# Altium PCB CCS_v3.3.PcbDoc
Units mil, origin at the board's own origin, x right, y up, seen from the top; angles counter-clockwise.
Board outline 2225 x 3035 mil, 2 copper layers (Top Layer, Bottom Layer); 37 components, 44 nets, 265 pads, 36 vias.
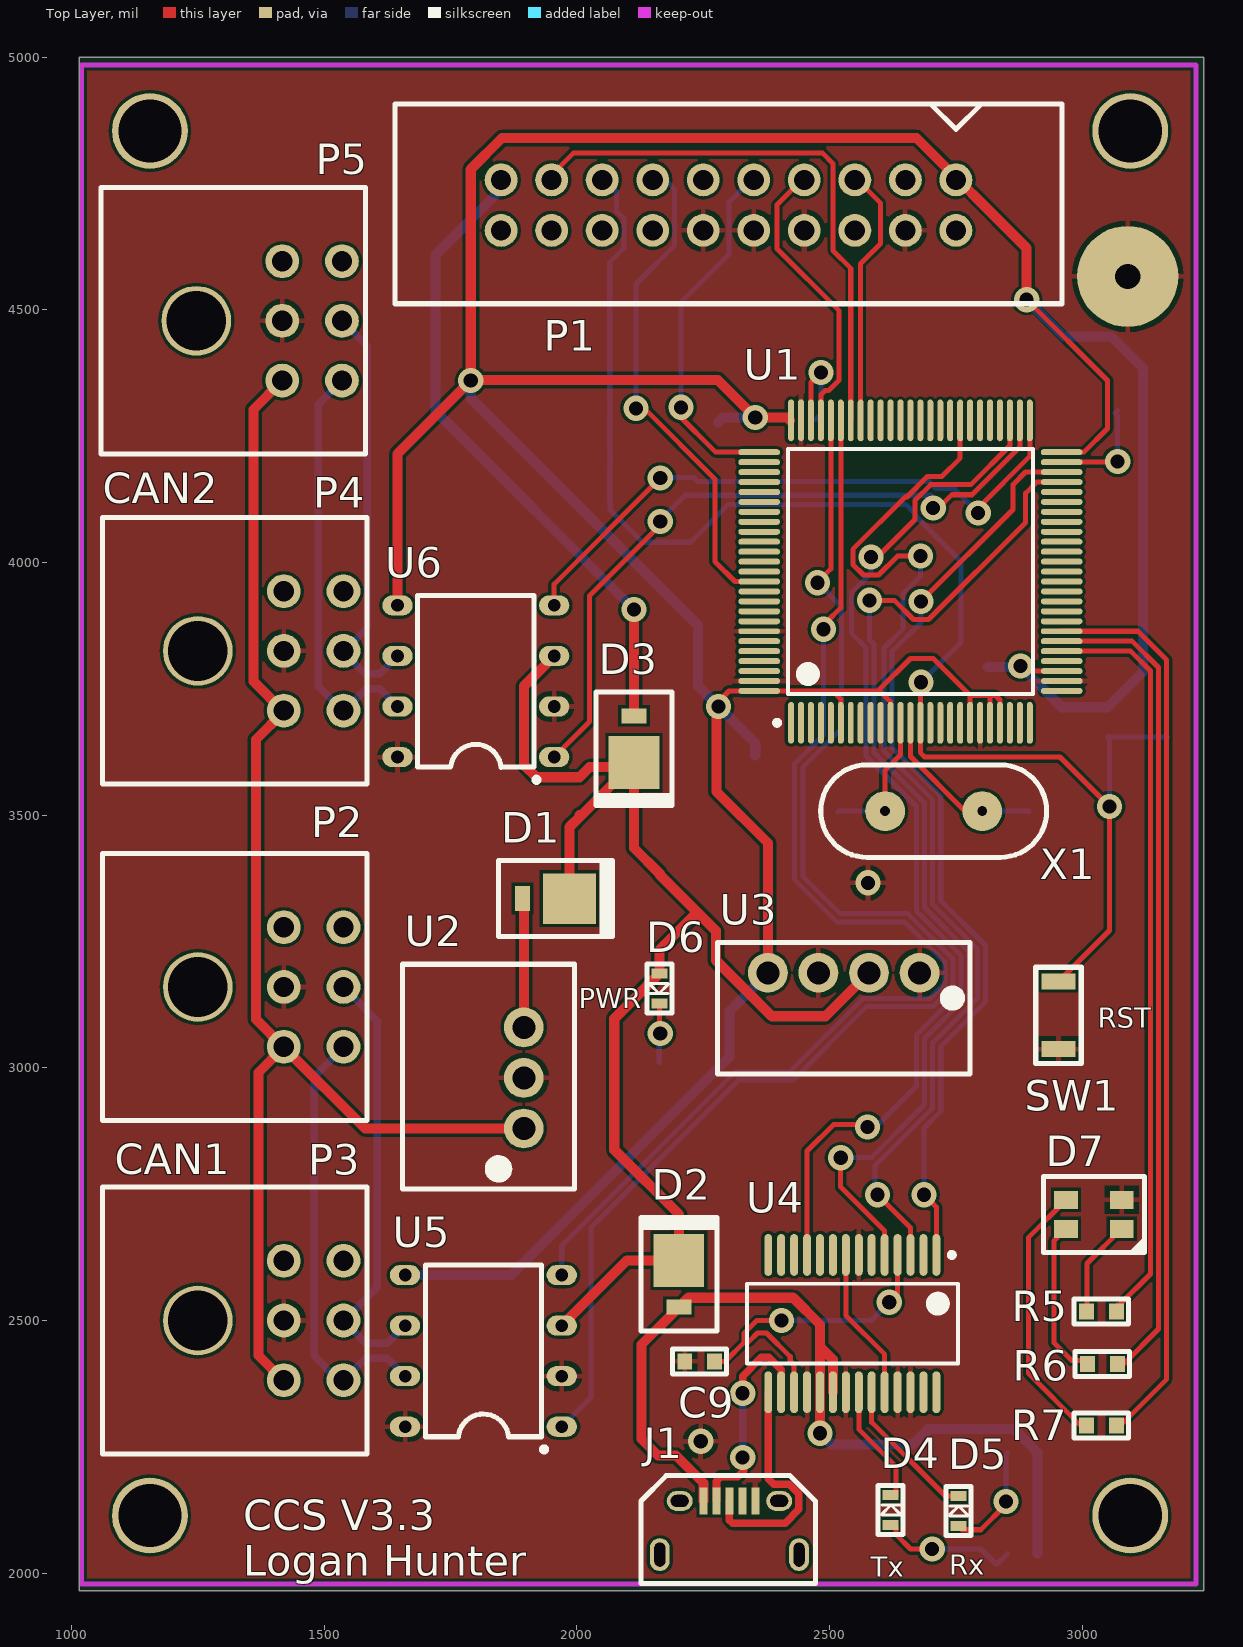
[diagram p0: Top Layer view]
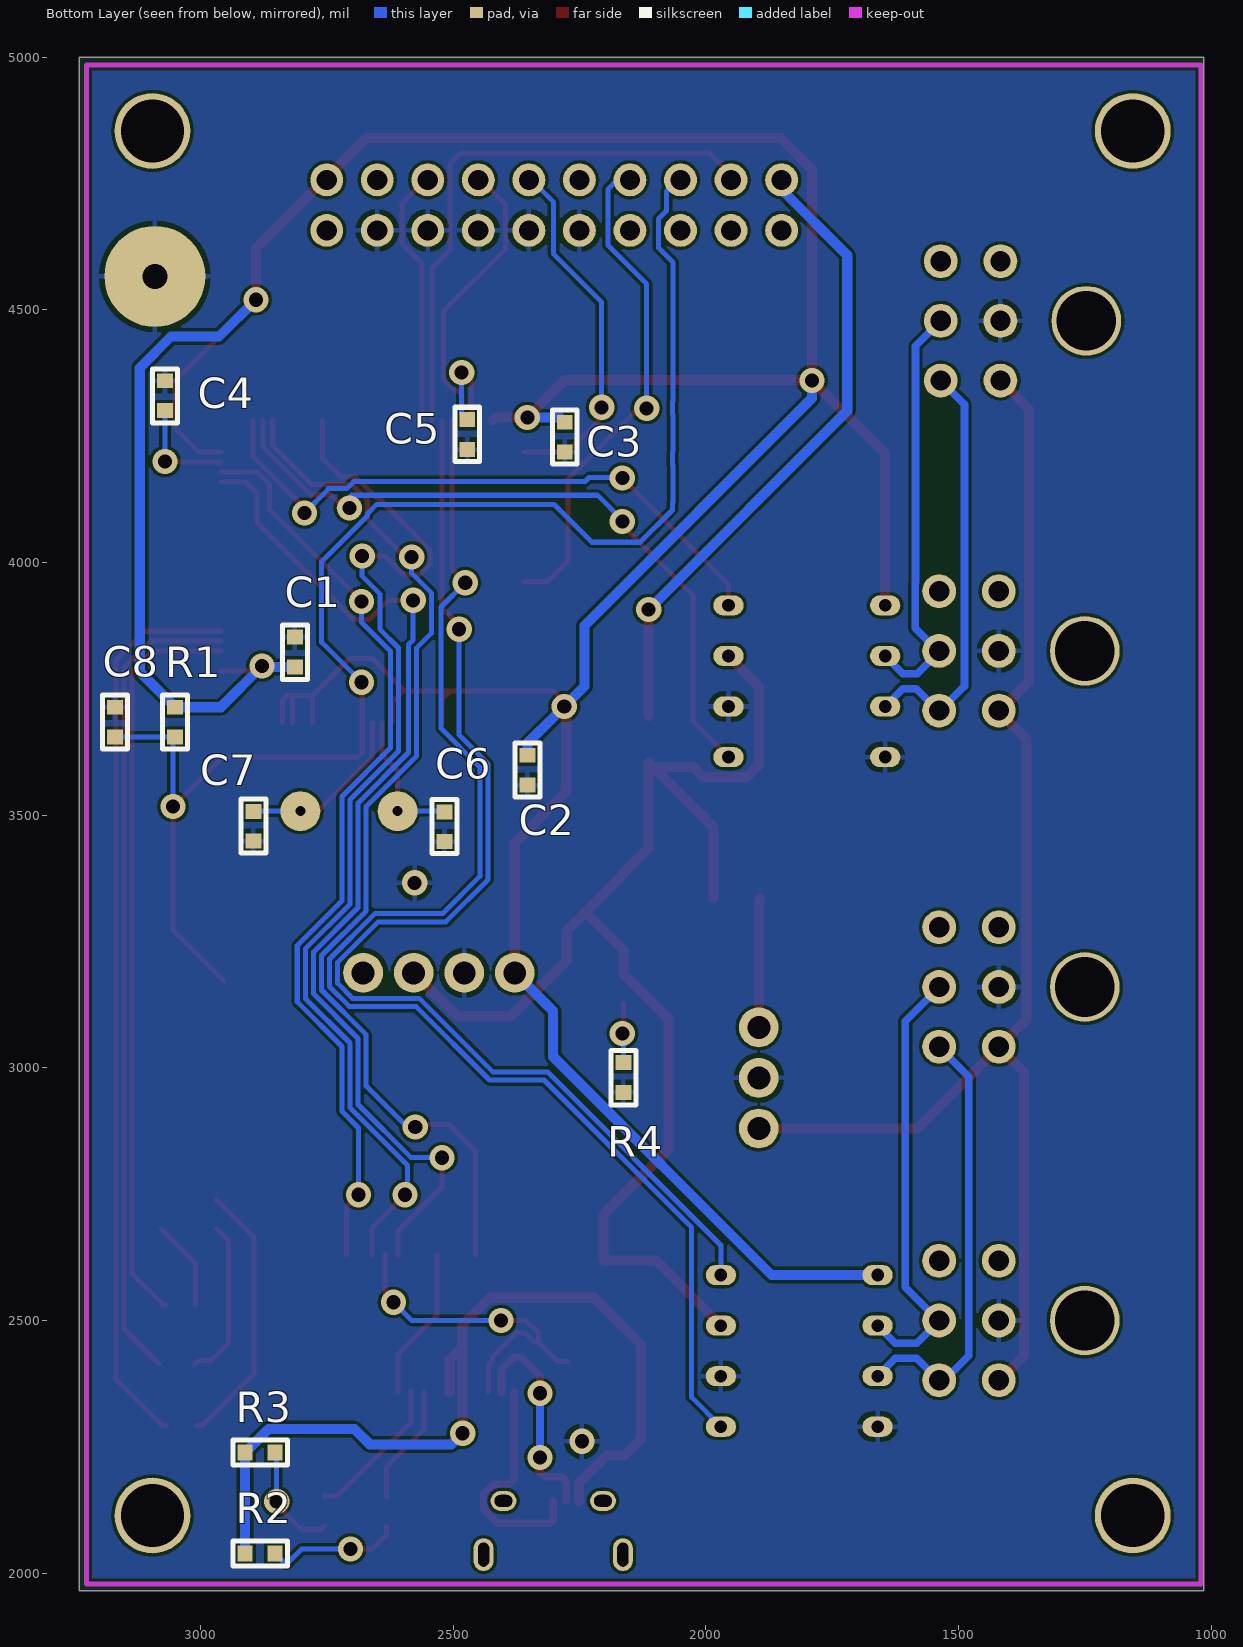
[diagram p1: Bottom Layer view, seen from below]

## Layer stack, top to bottom
Top Solder: solder mask 0.4, Solder Resist, Dk 3.5
Top Layer: signal copper 1.4
Dielectric 1: dielectric 12.6, FR-4, Dk 4.8
Bottom Layer: signal copper 1.4
Bottom Solder: solder mask 0.4, Solder Resist, Dk 3.5

## Board outline
1015,1965 3240,1965 3240,5000 1015,5000

## Design rules (kind name [scope] priority, off if disabled: settings)
Clearance [All] p1: gap=6
DiffPairsRouting [All] p1: maxlimit=10 minlimit=10 mostfreqgap=10 toplayer_minwidth=15 toplayer_maxwidth=15 toplayer_prefwidth=15 bottomlayer_minwidth=15 bottomlayer_maxwidth=15 bottomlayer_prefwidth=15 maxuncoupledlength=500
HoleSize [All] p1: absolutevalues=TRUE maxlimit=200 minlimit=6 maxpercent=80.000 minpercent=20.000
MinimumSolderMaskSliver [All] p1: minsoldermaskwidth=1
PolygonConnect [All] p1: connectstyle=Relief reliefconductorwidth=10 reliefentries=4 polygonreliefangle="90 Angle" airgapwidth=10
RoutingVias [All] p1: holewidth=28 width=50 viastyle="Through Hole" minholewidth=28 minwidth=50 maxholewidth=28 maxwidth=50
SilkToSilkClearance [All] p1: silktosilkclearance=3
SilkToSolderMaskClearance [IsPad] p1: minsilkscreentomaskgap=2 clearancetoexposedcopper=TRUE
SolderMaskExpansion [All] p1: expansion=4
Width [All] p1: maxlimit=30 minlimit=5 preferedwidth=10
25 further rules are at their usual default settings.

## Classes and differential pairs
component class Communications: C9 D4 D5 R2 R3 U4 U5 U6
component class Conectors: J1 P1 P2 P3 P4 P5
component class MCU: C4 C5 C6 C7 C8 D7 R1 R5 R6 R7 SW1 U1 X1
component class Power: C1 C2 C3 D1 D2 D3 D6 R4 U2 U3
differential pair CAN1: +CAN1_P -CAN1_N
differential pair CAN2: +CAN2_P -CAN2_N
differential pair USBD: +USBD_P -USBD_N

## Components (designator, comment, footprint, x,y, rotation, side; value= is the part's Value field where it differs from the comment)
C1 "SCH_GENERIC_CAPACITOR_0603" PCB_GENERIC_SMD_0603 2813,3823 r270 bottom
C2 "SCH_GENERIC_CAPACITOR_0603" PCB_GENERIC_SMD_0603 2353,3589 r90 bottom
C3 "SCH_GENERIC_CAPACITOR_0603" PCB_GENERIC_SMD_0603 2279,4248 r90 bottom
C4 "SCH_GENERIC_CAPACITOR_0603" PCB_GENERIC_SMD_0603 3070,4330 r270 bottom
C5 "SCH_GENERIC_CAPACITOR_0603" PCB_GENERIC_SMD_0603 2472,4253 r90 bottom
C6 "SCH_GENERIC_CAPACITOR_0603" PCB_GENERIC_SMD_0603 2517,3477 r90 bottom
C7 "SCH_GENERIC_CAPACITOR_0603" PCB_GENERIC_SMD_0603 2895,3478 r90 bottom
C8 "SCH_GENERIC_CAPACITOR_0603" PCB_GENERIC_SMD_0603 3169,3684 r90 bottom
C9 "SCH_GENERIC_CAPACITOR_0603" PCB_GENERIC_SMD_0603 2243,2419 r180 top
D1 "Schottky Diode" "ON Semi Schottky Diode - MBRM110LT1G" 1920,3335 r180 top
D2 "Schottky Diode" "ON Semi Schottky Diode - MBRM110LT1G" 2202,2554 r270 top
D3 "Schottky Diode" "ON Semi Schottky Diode - MBRM110LT1G" 2113,3669 r90 top
D4 "Green LED" SMD_0603_LED 2619,2125 r90 top
D5 "Orange LED" SMD_0603_LED 2753,2123 r90 top
D6 "Red LED" SMD_0603_LED 2165,3157 r270 top
D7 "TriColourLED" "TricolourLED - SunLED - DK  1497-1225-2-ND" 3023,2710 r0 top
J1 "Amphenol MicroUSB" "Amphenol MicroUSB" 2301.82,2143 r0 top
P1 "SWD/VCOM Header" "Samtec TST-110-01-G-D" 1850,4757 r0 top
P2 "CAN1" PCB_MLX_MICROFIT_3X2 1250,3160 r270 top
P3 "CAN1 TERM" PCB_MLX_MICROFIT_3X2 1250,2500 r270 top
P4 "CAN2" PCB_MLX_MICROFIT_3X2 1250,3825 r270 top
P5 "CAN2 TERM" PCB_MLX_MICROFIT_3X2 1246.9,4478.08 r270 top
R1 "SCH_GENERIC_RESISTOR_0603" PCB_GENERIC_SMD_0603 3050,3684 r90 bottom
R2 "SCH_GENERIC_RESISTOR_0603" PCB_GENERIC_SMD_0603 2881.98,2039 r180 bottom
R3 "SCH_GENERIC_RESISTOR_0603" PCB_GENERIC_SMD_0603 2881.98,2239 r180 bottom
R4 "SCH_GENERIC_RESISTOR_0603" PCB_GENERIC_SMD_0603 2163,2981 r270 bottom
R5 "SCH_GENERIC_RESISTOR_0603" PCB_GENERIC_SMD_0603 3038,2518 r180 top
R6 "SCH_GENERIC_RESISTOR_0603" PCB_GENERIC_SMD_0603 3040,2414 r180 top
R7 "SCH_GENERIC_RESISTOR_0603" PCB_GENERIC_SMD_0603 3038,2292 r180 top
SW1 "Reset Switch" "Push Button Switch" 2953,3104 r270 top
U1 "STM32F407VGT6" STM-LQFP100_M 2660,3982 r90 top
U2 "R78E-1.0 DC/DC" R78-1.0 1895,2980 r90 top
U3 "RECOM RO Series" "RECOM RO Series 1W DCDC" 2678,3188 r180 top
U4 "IC_FT232RL" SSOP-28 2545,2494 r270 top
U5 "MCP2562" MCP2562 1815,2440 r180 top
U6 "MCP2562" MCP2562 1800,3765 r180 top
X1 "XTAL" CRYSTAL_8MHZ 2706,3508 r0 top

## Footprints (in the part's own frame and the unit in brackets; to place one, negate y for a bottom-side part, rotate by r counter-clockwise, add the part's x,y. Pads: shape width x height; smd on the part's side, far side on the other; paste and mask are expansions set on the pad)
"Amphenol MicroUSB" [mm] "10118194-0001LF"
  rect 0.4x1.35 smd: 1(-1.3,0) 2(-0.65,0) 3(0,0) 4(0.65,0) 5(1.3,0)
  oval 1x1.65 hole 0.55 slot 1.2 at 90 deg: ""(-3.5,-2.7) ""(3.5,-2.7)
  oval 1.3x1 hole 0.6 slot 0.9 at 0 deg: ""(-2.5,0) ""(2.5,0)
  silkscreen extent -4.44,-4.15 4.32,1.27, body extent -4.06,-5.21 4.06,0.51, height 2.4
CRYSTAL_8MHZ [mm] "631-1100-ND"
  round 2 hole 0.5: 1(-2.44,0) 2(2.44,0)
  silkscreen extent -5.68,-2.32 5.68,2.32, body extent -5.59,-1.85 5.59,1.85, height 3.6
MCP2562 [mil]
  oval 60x40 hole 25: 1(-155,150) 2(-155,50) 3(-155,-50) 4(-155,-150) 5(155,-150) 6(155,-50) 7(155,50) 8(155,150)
  silkscreen extent -125,-170 115,200, body extent -115,-170 115,170, height 210
"ON Semi Schottky Diode - MBRM110LT1G" [mil]
  rect 105x100 smd: 1(-65,0)
  rect 30x50 smd: 2(27.5,0)
  silkscreen extent -150,-75 75,75, body extent -115,-65 0,65, height 40
PCB_GENERIC_SMD_0603 [mm]
  rect 0.75x0.8 smd: 1(-0.75,0) 2(0.75,0)
  silkscreen extent -1.35,-0.63 1.38,0.63, body extent -0.75,-0.5 0.75,0.5, height 0.45
PCB_MLX_MICROFIT_3X2 [mm]
  round 1.7 hole 1.02: 1(3,4.32) 2(0,4.32) 3(-3,4.32) 4(3,7.32) 5(0,7.32) 6(-3,7.32)
  round 3.5 hole 3: ""(0,0)
  silkscreen extent -6.7,-4.8 6.7,8.5, body extent -6.57,-4.65 6.58,7.59, height 8.83
"Push Button Switch" [mm]
  rect 0.8x1.7 smd: 1(-1.7,0) 2(1.7,0)
  silkscreen extent -2.41,-1.14 2.41,1.14, body extent -2.16,-0.89 2.16,0.89, height 1.6
R78-1.0 [mm]
  round 2 hole 1.15: 1(-2.54,0) 2(0,0) 3(2.54,0)
  silkscreen extent -5.59,-2.54 5.71,6.1, body extent -4.44,-1.59 4.45,5.4, height 10.4
"RECOM RO Series 1W DCDC" [mm] "RO-053.3S"
  round 2 hole 1.15: 1(0,0) 2(2.54,0) 3(5.08,0) 4(7.62,0)
  silkscreen extent -2.54,-1.52 10.16,5.08, body extent -2.41,-1.4 10.03,4.95, height 10
"Samtec TST-110-01-G-D" [mil] "TST-110-01-G-D"
  round 65 hole 40: 1(900,0) 2(900,-100) 3(800,0) 4(800,-100) 5(700,0) 6(700,-100) 7(600,0) 8(600,-100) 9(500,0) 10(500,-100) 11(400,0) 12(400,-100) 13(300,0) 14(300,-100) 15(200,0) 16(200,-100) 17(100,0) 18(100,-100) 19(0,0) 20(0,-100)
  silkscreen extent -210,-245 1110,150, body extent -200,-233 1100,132, height 350
SMD_0603_LED [mm]
  rect 0.5x0.8 smd: 1(-0.747,-0.047) 2(0.753,-0.047)
  silkscreen extent -1.22,-0.67 1.23,0.58, body extent -0.75,-0.55 0.75,0.45, height 0.45
SSOP-28 [mm] "28-Pin SSOP 0.65 mm Pitch"
  oval 2.1x0.4 smd: 1(-3.45,4.225) 2(-3.45,3.575) 3(-3.45,2.925) 4(-3.45,2.275) 5(-3.45,1.625) 6(-3.45,0.975) 7(-3.45,0.325) 8(-3.45,-0.325) 9(-3.45,-0.975) 10(-3.45,-1.625) 11(-3.45,-2.275) 12(-3.45,-2.925) 13(-3.45,-3.575) 14(-3.45,-4.225) 15(3.45,-4.225) 16(3.45,-3.575) 17(3.45,-2.925) 18(3.45,-2.275) 19(3.45,-1.625) 20(3.45,-0.975) 21(3.45,-0.325) 22(3.45,0.325) 23(3.45,0.975) 24(3.45,1.625) 25(3.45,2.275) 26(3.45,2.925) 27(3.45,3.575) 28(3.45,4.225)
  silkscreen extent -3.57,-5.3 2,5.3, body extent -2.7,-5.3 2.7,5.3, height 2
STM-LQFP100_M [mm] "Thin QFP, 100-Leads, Body 14x14mm, Pitch 0.5mm, IPC Low Density"
  oval 2.1x0.3 smd: 1(-7.6,6) 2(-7.6,5.5) 3(-7.6,5) 4(-7.6,4.5) 5(-7.6,4) 6(-7.6,3.5) 7(-7.6,3) 8(-7.6,2.5) 9(-7.6,2) 10(-7.6,1.5) 11(-7.6,1) 12(-7.6,0.5) 13(-7.6,0) 14(-7.6,-0.5) 15(-7.6,-1) 16(-7.6,-1.5) 17(-7.6,-2) 18(-7.6,-2.5) 19(-7.6,-3) 20(-7.6,-3.5) 21(-7.6,-4) 22(-7.6,-4.5) 23(-7.6,-5) 24(-7.6,-5.5) 25(-7.6,-6) 51(7.6,-6) 52(7.6,-5.5) 53(7.6,-5) 54(7.6,-4.5) 55(7.6,-4) 56(7.6,-3.5) 57(7.6,-3) 58(7.6,-2.5) 59(7.6,-2) 60(7.6,-1.5) 61(7.6,-1) 62(7.6,-0.5) 63(7.6,0) 64(7.6,0.5) 65(7.6,1) 66(7.6,1.5) 67(7.6,2) 68(7.6,2.5) 69(7.6,3) 70(7.6,3.5) 71(7.6,4) 72(7.6,4.5) 73(7.6,5) 74(7.6,5.5) 75(7.6,6)
  oval 0.3x2.1 smd: 26(-6,-7.6) 27(-5.5,-7.6) 28(-5,-7.6) 29(-4.5,-7.6) 30(-4,-7.6) 31(-3.5,-7.6) 32(-3,-7.6) 33(-2.5,-7.6) 34(-2,-7.6) 35(-1.5,-7.6) 36(-1,-7.6) 37(-0.5,-7.6) 38(0,-7.6) 39(0.5,-7.6) 40(1,-7.6) 41(1.5,-7.6) 42(2,-7.6) 43(2.5,-7.6) 44(3,-7.6) 45(3.5,-7.6) 46(4,-7.6) 47(4.5,-7.6) 48(5,-7.6) 49(5.5,-7.6) 50(6,-7.6) 76(6,7.6) 77(5.5,7.6) 78(5,7.6) 79(4.5,7.6) 80(4,7.6) 81(3.5,7.6) 82(3,7.6) 83(2.5,7.6) 84(2,7.6) 85(1.5,7.6) 86(1,7.6) 87(0.5,7.6) 88(0,7.6) 89(-0.5,7.6) 90(-1,7.6) 91(-1.5,7.6) 92(-2,7.6) 93(-2.5,7.6) 94(-3,7.6) 95(-3.5,7.6) 96(-4,7.6) 97(-4.5,7.6) 98(-5,7.6) 99(-5.5,7.6) 100(-6,7.6)
  silkscreen extent -7.72,-6.15 6.15,6.82, body extent -7,-7 7,7, height 1.6
"TricolourLED - SunLED - DK  1497-1225-2-ND" [mm]
  rect 1.2x0.9 smd: 1(1.4,-0.725) 2(-1.4,-0.725) 3(-1.4,0.725) 4(1.4,0.725)
  silkscreen extent -2.54,-1.91 2.54,1.91, body extent -1.84,-1.52 1.84,1.52, height 1.9

## Part data
C1 C2 C3 C4 C5 C6 C7 C8 C9: "Generic SMD capacitor 0603"
D1 D2 D3: library part "ON Semi Schottky Diode - MBRM110LT1G"
D4 D5 D6: library part SMD_0603_LED
J1: library part "Amphenol MicroUSB - 609-4618-1-ND"
P2 P3 P4 P5: library part SCH_MLX_MICROFIT_3X2
R1 R2 R3 R4 R5 R6 R7: "Generic SMD resistor 0603"
SW1: library part PushButtonSwitch
U1: "ARM Cortex-M4 32-bit MCU+FPU, 210 DMIPS, 1024 kB Flash, 192 kB Internal RAM, 82 I/Os, 100-pin LQFP, -40 to 85 degC, Tray"
U2: library part R78E-1.0
U3: library part "RECOM RO Series DCDC Converter"
U4: "FT232R USB UART"
X1: library part Crystal

## Free pads (board coordinates)
  round 150 hole 125: ""(1155,2114) ""(1155,4854) ""(3095,2114) ""(3095,4854)
  round 200 hole 50: ""(3090,4566)

## Via types
v1: diameter 50, hole 28, Top Layer to Bottom Layer, 36 vias

## Nets (pads, with @x,y where several pads share a name; then routed paths per layer and width w, separated by ;. In a path a pad name is that pad's centre, name@x,y a point inside that pad or via, vN(x,y) a via of type N, cw(c..) or ccw(c..) an arc to the next point about the centre after c; other vN are vias at no path point)
3.3V: C1.2 C2.2 C3.2 P1.1 R1.2 U1.6 U1.11 U1.19 U1.21 U1.22 U1.28 U1.50 U1.75 U1.100 U3.4 U5.5 U6.5 | length 8214.9
  Top Layer w10: v1@2280,3725 2300.78,3745.78 U1.100 2506.22,3745.78 ; U1.6 2522.2,3729.8 2506.22,3745.78 ; 2599.22,3745.78 2506.22,3745.78 ; U1.11 2620.63,3724.37 2597.5,3747.5 2660,3810 2705,3810 2778.11,3736.89 ; U1.19 2778.11,3736.89 ; U1.21 2817.48,3734.41 2815,3736.89 ; U1.22 2837.17,3727.83 2828.11,3736.89 2815,3736.89 ; v1(2878,3795) 2887.85,3785.15 U1.28 ; v1(2890,4520) 3050,4360 3050,4265 3003.22,4218.22 U1.50 ; 2778.11,3736.89 2815,3736.89
  Top Layer w20: U6.5 1645,4215 v1(1790,4360) ; v1@2276,3711 2276,3547 2378,3445 U3.4 ; U1.75@2421.56,4281.21 2415.77,4287 v1(2353,4287) 2279,4361 1791,4361 v1(1790,4360) ; v1(2890,4520) 2890,4622 2672,4840 1852,4840 1790,4778 v1(1790,4360)
  Bottom Layer w20: U5.5 1870,2590 2302,3022 2302,3112 U3.4 ; v1(1790,4360) 1790,4325 2240,3875 2240,3755 v1(2280,3715) ; C3.2 2288.47,4287 v1(2353,4287) ; 2299.5,3695.5 2353,3642 C2.2 ; C1.2 2876.47,3793.47 v1(2878,3795) 2959.47,3713.53 R1.2 3120,3783.53 3120,4385 3058,4447 2963,4447 v1(2890,4520)
5V: D1.1 D2.1 D3.1 D6.1 U3.2 U5.3 U6.3 | length 2744.2
  Top Layer w20: U6.3 1895,3755 1895,3600 1920,3575 2005,3575 2025,3595 2104,3595 D3.1 ; U5.3 2099,2619 D2.1 2202,2710 2074,2838 2074,3097.26 D6.1 2163.15,3233.15 2238.15,3308.15 ; D1.1 1985,3476 2009,3500 ; 2005,3500 2009,3500 ; 2163.15,3383.15 2238.15,3308.15 ; 2164,3384 2113,3435 D3.1 ; U3.2 2492,3102 2385.69,3102 2275,3212.69 2275,3271.3 2238.15,3308.15 ; 2009,3500 D3.1
"5V - DCDC": D1.2 U2.3 | length 256
  Top Layer w20: D1.2 1895,3332.5 U2.3
"5V - DEBUG": D3.2 P1.19 | length 1282.1
  Top Layer w20: D3.2 v1(2113,3907)
  Bottom Layer w20: P1.19@1850,4762 1850,4738 1720,4608 1720,4300 v1(2113,3907)
"5V - USB": D2.2 J1.1 R2.1 R3.1 U4.19 U4.20 | length 1780.8
  Top Layer w20: J1.1 2250.64,2178.36 2196,2233 2160.64,2233 2128,2265.64 2128,2452.5 D2.2 2220.5,2545 2428,2545 2481.02,2491.98 U4.19 v1(2481.02,2277.02) ; 2481.02,2447.98 2506.61,2422.39 U4.20
  Bottom Layer w20: v1(2481.02,2277.02) 2503.05,2255 2665,2255 2695,2285 2865.51,2285 R3.1 R2.1
12V: P2.1 P3.1 P4.1 P5.1 U2.1 | length 2664.2
  Top Layer w20: P5.1@1417.08,4367.92 1417.08,4359.89 1360,4302.81 1360,3764.97 1420.08,3704.89 1365,3649.81 1365,3095.97 P2.1@1420.08,3040.89 ; P3.1@1420.08,2380.89 1370,2430.97 1370,2990.81 P2.1@1420.08,3040.89 ; U2.1 1580.97,2880 P2.1@1420.08,3040.89
BLUE_LED: R7.1 U1.32 | length 1791.9
  Top Layer w10: U1.32 3110.11,3863.89 3167,3807 3167,2384 3075,2292 R7.1
CAN1_N: P2.5 P3.5 U5.6 | length 869.9
  Bottom Layer w15: P2.5@1538.19,3159 1605,3092.19 1605,2565.81 1538.19,2499 1582.19,2455 1625,2455 U5.6
CAN1_P: P2.4 P3.4 U5.7 | length 868.1
  Bottom Layer w15: P2.4@1538.19,3040.89 1480,2982.7 1480,2430 1529.11,2380.89 1538.19,2380.89 1582.3,2425 1625,2425 U5.7
CAN1_RX: U1.70 U5.4 | length 2367.3
  Top Layer w10: v1@2495,3883 2522.2,3910.2 U1.70
  Bottom Layer w10: U5.4 1970,2648.63 2313.37,2992 2421.37,2992 2567,3137.63 2639.17,3137.63 2698.86,3137.63 2728.37,3167.14 2728.37,3208.86 2648.23,3289 2514.37,3289 2431,3372.37 2431,3601.63 2488,3658.63 v1(2488,3868)
CAN1_TX: U1.71 U5.1 | length 2703.8
  Top Layer w10: v1@2484.5,3969.5 2502.52,3987.52 U1.71
  Bottom Layer w10: U5.1 2028,2348 2028,2684 2320,2976 2428,2976 2573.63,3121.63 2705.49,3121.63 2744.37,3160.51 2744.37,3215.49 2654.86,3305 2521,3305 2447,3379 2447,3595 2524,3672 2524,3912 v1(2476,3960)
CAN2_N: P4.5 P5.5 U6.6 | length 834.3
  Bottom Layer w15: P5.5@1535.19,4478 1585,4428.19 1585,3960.87 1585.15,3960.72 1585.15,3869.96 1538.19,3823 1581.19,3780 1610,3780 U6.6
CAN2_P: P4.4 P5.4 U6.7 | length 835.3
  Bottom Layer w15: P5.4@1535.19,4359.89 1488.08,4312.78 1488.08,3755 1538.19,3704.89 1583.3,3750 1610,3750 U6.7
CAN2_RX: U1.51 U6.4 | length 1236.6
  Top Layer w10: U6.4 1955,3957 v1(2165,4167) v1@2164,4168 ; v1(2794,4098) 2794,4108 2896.22,4210.22 U1.51
  Bottom Layer w10: v1@2155,4173 2160,4168 2231,4168 2239,4160 2696.63,4160 2710.63,4146 2747,4146 2747,4145 v1(2794,4098)
CAN2_TX: U1.52 U6.1 | length 1442.8
  Top Layer w10: U6.1 2025,3685 2025,3934 2165,4074 v1(2165,4081) ; v1(2705,4108) 2716,4108 2742,4134 2782,4134 2876.54,4228.54 U1.52
  Bottom Layer w10: v1(2165,4081) 2165,4084 2214,4133 2701,4133 2726,4108 v1(2705,4108)
GND: C1.1 C2.1 C3.1 C4.1 C5.1 C6.1 C7.1 C8.2 C9.2 D7.4 J1.5 P1.4 P1.6 P1.8 P1.10 P1.12 P2.2 P3.2 P4.2 P5.2 pad.@3090,4566 R4.2 SW1.2 U1.10 U1.20 U1.27 U1.74 U1.94 U1.99 U2.2 U3.1 U3.3 U4.7 U4.18 U4.21 U4.25 U4.26 U5.2 U5.8 U6.2 U6.8
  other v1: 2245,2261 2576,3366
GREEN_LED: R6.1 U1.31 | length 1620
  Top Layer w10: U1.31 3098.8,3844.2 3151,3792 3151,2483 R6.1@3082,2414
NC: U4.8 U4.24 | length 303.5
  Top Layer w10: U4.8 2532.2,2509.8 2608.98,2433.02 U4.24
NetC4_2: C4.2 U1.49 | length 216
  Top Layer w10: U1.49 3068.54,4198.54 v1(3070,4200)
  Bottom Layer w10: v1(3070,4200) 3070,4290.47 3065,4295.47 C4.2
NetC5_2: C5.2 U1.73 | length 201
  Top Layer w10: U1.73 2463.15,4356.15 v1(2483,4376)
  Bottom Layer w10: C5.2 2483,4293.53 v1(2483,4376)
NetC7_2: C7.2 U1.13 X1.2 | length 346.7
  Top Layer w10: U1.13 2660,3616 2768,3508 X1.2
  Bottom Layer w10: X1.2 2894.53,3508 C7.2
NetC9_1: C9.1 U4.4 U4.17 | length 698.1
  Top Layer w10: C9.1 2293,2419 2333,2459 ; v1(2405,2500) 2356,2500 2331.16,2475.16 2331.16,2458 2339.84,2458 2357.34,2475.5 2375.02,2475.5 2422.16,2428.36 2422.16,2419.84 2429.84,2412.16 U4.17 ; v1(2618,2536) 2634.57,2552.57 U4.4
  Bottom Layer w10: v1(2405,2500) 2582,2500 v1(2618,2536)
NetD4_1: D4.1 R2.2 | length 270.7
  Top Layer w10: D4.1@2631.85,2092.59 2631.85,2076.15 2660,2048 v1(2703,2048)
  Bottom Layer w10: v1(2703,2048) 2799.46,2048 2830.46,2017 R2.2
NetD4_2: D4.2 U4.22 | length 237.2
  Top Layer w10: U4.22 2557.8,2284.8 2631.85,2210.74 D4.2@2631.85,2151.65
NetD5_1: D5.1 R3.2 | length 236.6
  Top Layer w10: D5.1 2762.44,2086 2799.26,2086 2849,2135.74 v1(2849,2142) v1@2849,2156
  Bottom Layer w10: v1(2849,2142) 2849,2235.54 R3.2
NetD5_2: D5.2 U4.23 | length 291.5
  Top Layer w10: U4.23 2583.39,2298.61 2729.35,2152.65 D5.2
NetD6_2: D6.2 R4.1 | length 118.4
  Top Layer w10: D6.2 2163.15,3069.85 v1(2165,3068)
  Bottom Layer w10: R4.1 2163,3066 v1(2165,3068)
NetD7_1: D7.1 R5.2 | length 178.9
  Top Layer w10: R5.2@3009.47,2531 3009.47,2612.81 D7.1
NetD7_2: D7.2 R6.2 | length 319.2
  Top Layer w10: D7.2 2944,2657.57 2944,2456 2978.74,2421.26 3003.21,2421.26 R6.2
NetD7_3: D7.3 R7.2 | length 531.3
  Top Layer w10: D7.3 2894,2664.66 2894,2395 2997,2292 R7.2
NRST: C8.1 P1.15 R1.1 SW1.1 U1.14 | length 2966.7
  Top Layer w10: v1(2681,3763) 2679.68,3761.68 U1.14 2679.68,3623.68 2688.37,3615 2956,3615 v1(3054,3517) 3054,3271.93 SW1.1
  Bottom Layer w10: P1.15@2050,4762 2078,4734 2078,4695.52 2093.5,4680.02 2093.5,4622.5 2065,4594 2065,4319.84 2066,4318.84 2066,4293.16 2065,4292.16 2065,4219.84 2066,4218.84 2066,4193.16 2065,4192.16 2065,4119.84 2066,4118.84 2066,4104 2130,4040 2225.12,4040 2300.12,4115 2651,4115 2669,4097 2669,4093.09 2760,4002.09 2760,3842 v1(2681,3763) ; v1(3054,3517) 3054,3650.47 R1.1 C8.1
RED_LED: R5.1 U1.30 | length 1477
  Top Layer w10: U1.30 3095.85,3824.52 3135,3785.37 3135,2592.25 3073.75,2531 R5.1@3068.53,2531
SCLK: C6.2 U1.12 X1.1 | length 280.9
  Top Layer w10: X1.1 2609.94,3588.94 2640.32,3619.32 U1.12
  Bottom Layer w10: C6.2 2518.47,3508 X1.1
SWCLK: P1.9 U1.76 | length 722.9
  Top Layer w10: v1(2206,4307) 2206,4299 2200,4293 2274.78,4218.22 U1.76
  Bottom Layer w10: v1(2206,4307) 2206,4515 2301,4610 2301,4713 P1.9@2350,4762
SWDIO: P1.7 U1.72 | length 573.3
  Top Layer w10: P1.7@2450,4762 2396,4708 2396,4621 2519,4498 2519,4361.09 2497.91,4340 2490.77,4340 2482.83,4332.07 U1.72
SWO: P1.13 U1.89 | length 999.7
  Top Layer w10: v1(2117,4305) 2133.12,4305 2273,4165.12 2273,4002 2312.68,3962.32 U1.89
  Bottom Layer w10: v1(2117,4305) 2117,4551 2193.5,4627.5 2193.5,4738.5 2170,4762 P1.13@2150,4762
UART1_RX: P1.17 U1.69 | length 1111.2
  Top Layer w10: P1.17@1950,4762 1950,4767 1993.5,4810.5 2485.5,4810.5 2506.5,4789.5 2506.5,4617.5 2541.89,4582.11 U1.69
UART1_TX: P1.5 U1.68 | length 518.2
  Top Layer w10: P1.5@2550,4762 2601,4711 2601,4631 2561.57,4591.57 U1.68
UART3_CTS: U1.58 U4.3 | length 2152.5
  Top Layer w10: v1(2595,2749) 2660.16,2683.84 U4.3 ; v1(2680,4013) 2634.91,4013 2596.91,3975 2567.09,3975 2546,3996.09 2546,4025.91 2649.63,4129.54 2653,4129.54 2693.46,4170 2722,4170 2758.43,4206.43 U1.58
  Bottom Layer w10: v1(2595,2749) 2590.25,2753.75 2590.25,2807 2704,2920.75 2704,3049 2792.37,3137.37 2792.37,3235.37 2704,3323.74 2704,3530.43 2607.81,3626.61 2607.81,3830.81 2645,3868 2645,3937.91 2680,3972.91 v1(2680,4013)
UART3_RTS: U1.53 U4.11 | length 2114.1
  Top Layer w10: U4.11 2455.43,2835.43 2508,2888 2570,2888 v1(2575,2883) ; v1(2582,4011) 2595,4011 2669,4085 2669,4122.91 2700.09,4154 2779.37,4154 2856.85,4231.48 U1.53
  Bottom Layer w10: v1(2575,2883) 2583,2875 2672,2964 2672,3065.51 2760.37,3153.88 2760.37,3222.12 2672,3310.49 2672,3517.17 2572,3617.17 2572,3831 2543,3860 2543,3939.91 2582,3978.91 v1(2582,4011)
UART3_RX: U1.48 U4.1 | length 1866.6
  Top Layer w10: v1(2681,3923) 2863,4105 2863,4154.01 2887.84,4178.85 U1.48 ; v1(2687,2749) 2711.34,2724.66 U4.1
  Bottom Layer w10: v1(2681,3923) 2681,3881.37 2623.81,3824.19 2623.81,3633.24 2720,3537.05 2720,3330.37 2808.37,3242 2808.37,3130.74 2720,3042.37 2720,2914.12 2687,2881.12 v1(2687,2749)
UART3_TX: U1.47 U4.5 | length 2096.4
  Top Layer w10: v1(2522,2822) 2522,2764 2608.98,2677.02 U4.5 ; v1(2579,3925) 2628.09,3925 2666.09,3887 2695.91,3887 2888,4079.09 2888,4137 2910.17,4159.17 U1.47
  Bottom Layer w10: v1(2522,2822) 2523,2823 2583.63,2823 2688,2927.37 2688,3058 2776.37,3146.37 2776.37,3228.75 2688,3317.12 2688,3523.8 2588,3623.8 2588,3837.63 2579,3846.63 v1(2579,3925)
USBD_N: J1.2 U4.16 | length 436.5
  Top Layer w15: J1.2@2276.82,2143.59 J1.2 2276.23,2182.23 2285,2191 2318,2191 2330,2203 2330,2227 v1(2328,2229) ; v1(2328,2356) 2328,2390 2365,2427 2380,2427 2404.25,2402.75 U4.16
  Bottom Layer w15: v1(2328,2229) v1(2328,2356)
USBD_P: J1.3 U4.15 | length 465.2
  Top Layer w15: J1.3 2301.82,2105.18 2308,2099 2412,2099 2439.33,2126.33 2437.87,2127.79 2439.33,2129.25 2439.33,2156.75 2419.9,2176.18 2389.48,2176.18 2378.66,2187.01 U4.15
pads on no net: J1. J1.4 P1.2 P1.3 P1.11 P1.14 P1.16 P1.18 P1.20 P2. P2.3 P2.6 P3. P3.3 P3.6 P4. P4.3 P4.6 P5. P5.3 P5.6 U1.1 U1.2 U1.3 U1.4 U1.5 U1.7 U1.8 U1.9 U1.15 U1.16 U1.17 U1.18 U1.23 U1.24 U1.25 U1.26 U1.29 U1.33 U1.34 U1.35 U1.36 U1.37 U1.38 U1.39 U1.40 U1.41 U1.42 U1.43 U1.44 U1.45 U1.46 U1.54 U1.55 U1.56 U1.57 U1.59 U1.60 U1.61 U1.62 U1.63 U1.64 U1.65 U1.66 U1.67 U1.77 U1.78 U1.79 U1.80 U1.81 U1.82 U1.83 U1.84 U1.85 U1.86 U1.87 U1.88 U1.90 U1.91 U1.92 U1.93 U1.95 U1.96 U1.97 U1.98 U4.2 U4.6 U4.9 U4.10 U4.12 U4.13 U4.14 U4.27 U4.28

## Polygon pours and split planes (outlines as drawn)
GND on Top Layer "GND_Top" (solid, remove dead copper, pour order 10): 1020,4984 3214,4984 3215,4985 3225,4975 3225,1979 1020,1979
GND on Bottom Layer "GND_Bottom" (solid, remove dead copper, pour order 8): 1020,4984 3225,4984 3225,1979 1020,1979

## Keep-outs
Keep-Out Layer:
  lines w10: 1020,1979 1020,4984 3225,4984 3225,1979 1020,1979

## Silkscreen, mask and mechanical layers (free items; w line width, h text height)
Top Overlay:
  text "CAN2" at 1062,4117 h60
  text "PWR" at 2004,3118 h39.37
  text "RST" at 3031,3079 h39.37
  text "CAN1" at 1086,2789 h60
  text "Rx" at 2737,1997 h39.37
  text "CCS V3.3 / Logan Hunter" at 1340,1995 h60
  text "Tx" at 2581,1993 h39.37